# Altium PCB SpeakEasy_Audio.PcbDoc
Units mil, origin at the board's own origin, x right, y up, seen from the top; angles counter-clockwise.
Board outline 3149.61 x 3149.61 mil, 2 copper layers (Top Layer, Bottom Layer), stack 62.8 mil thick; 104 components, 69 nets, 289 pads, 95 vias.
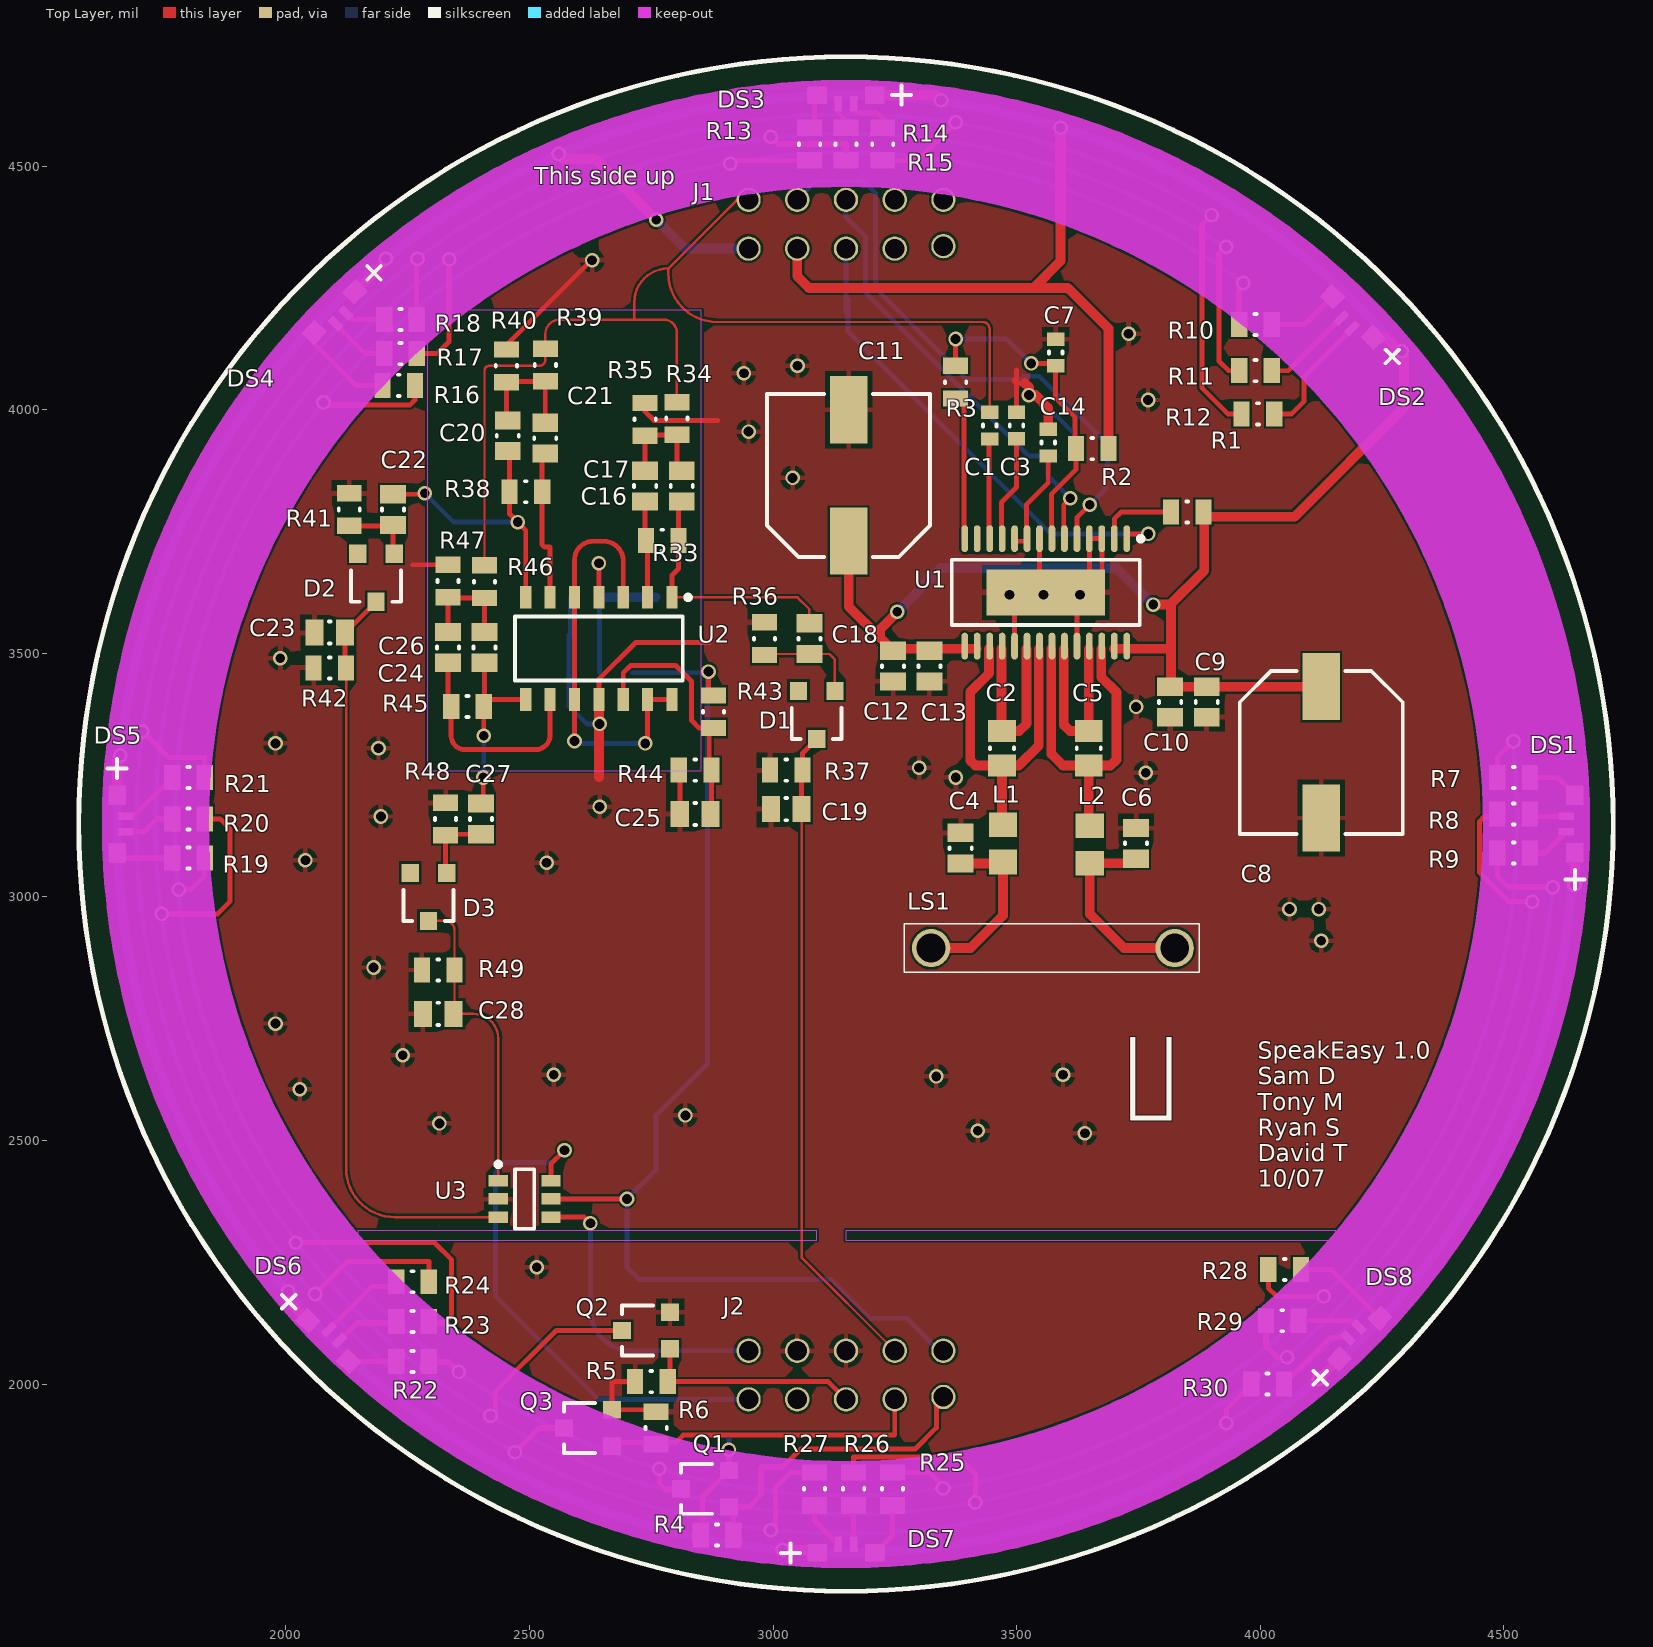
[diagram p0: Top Layer view]
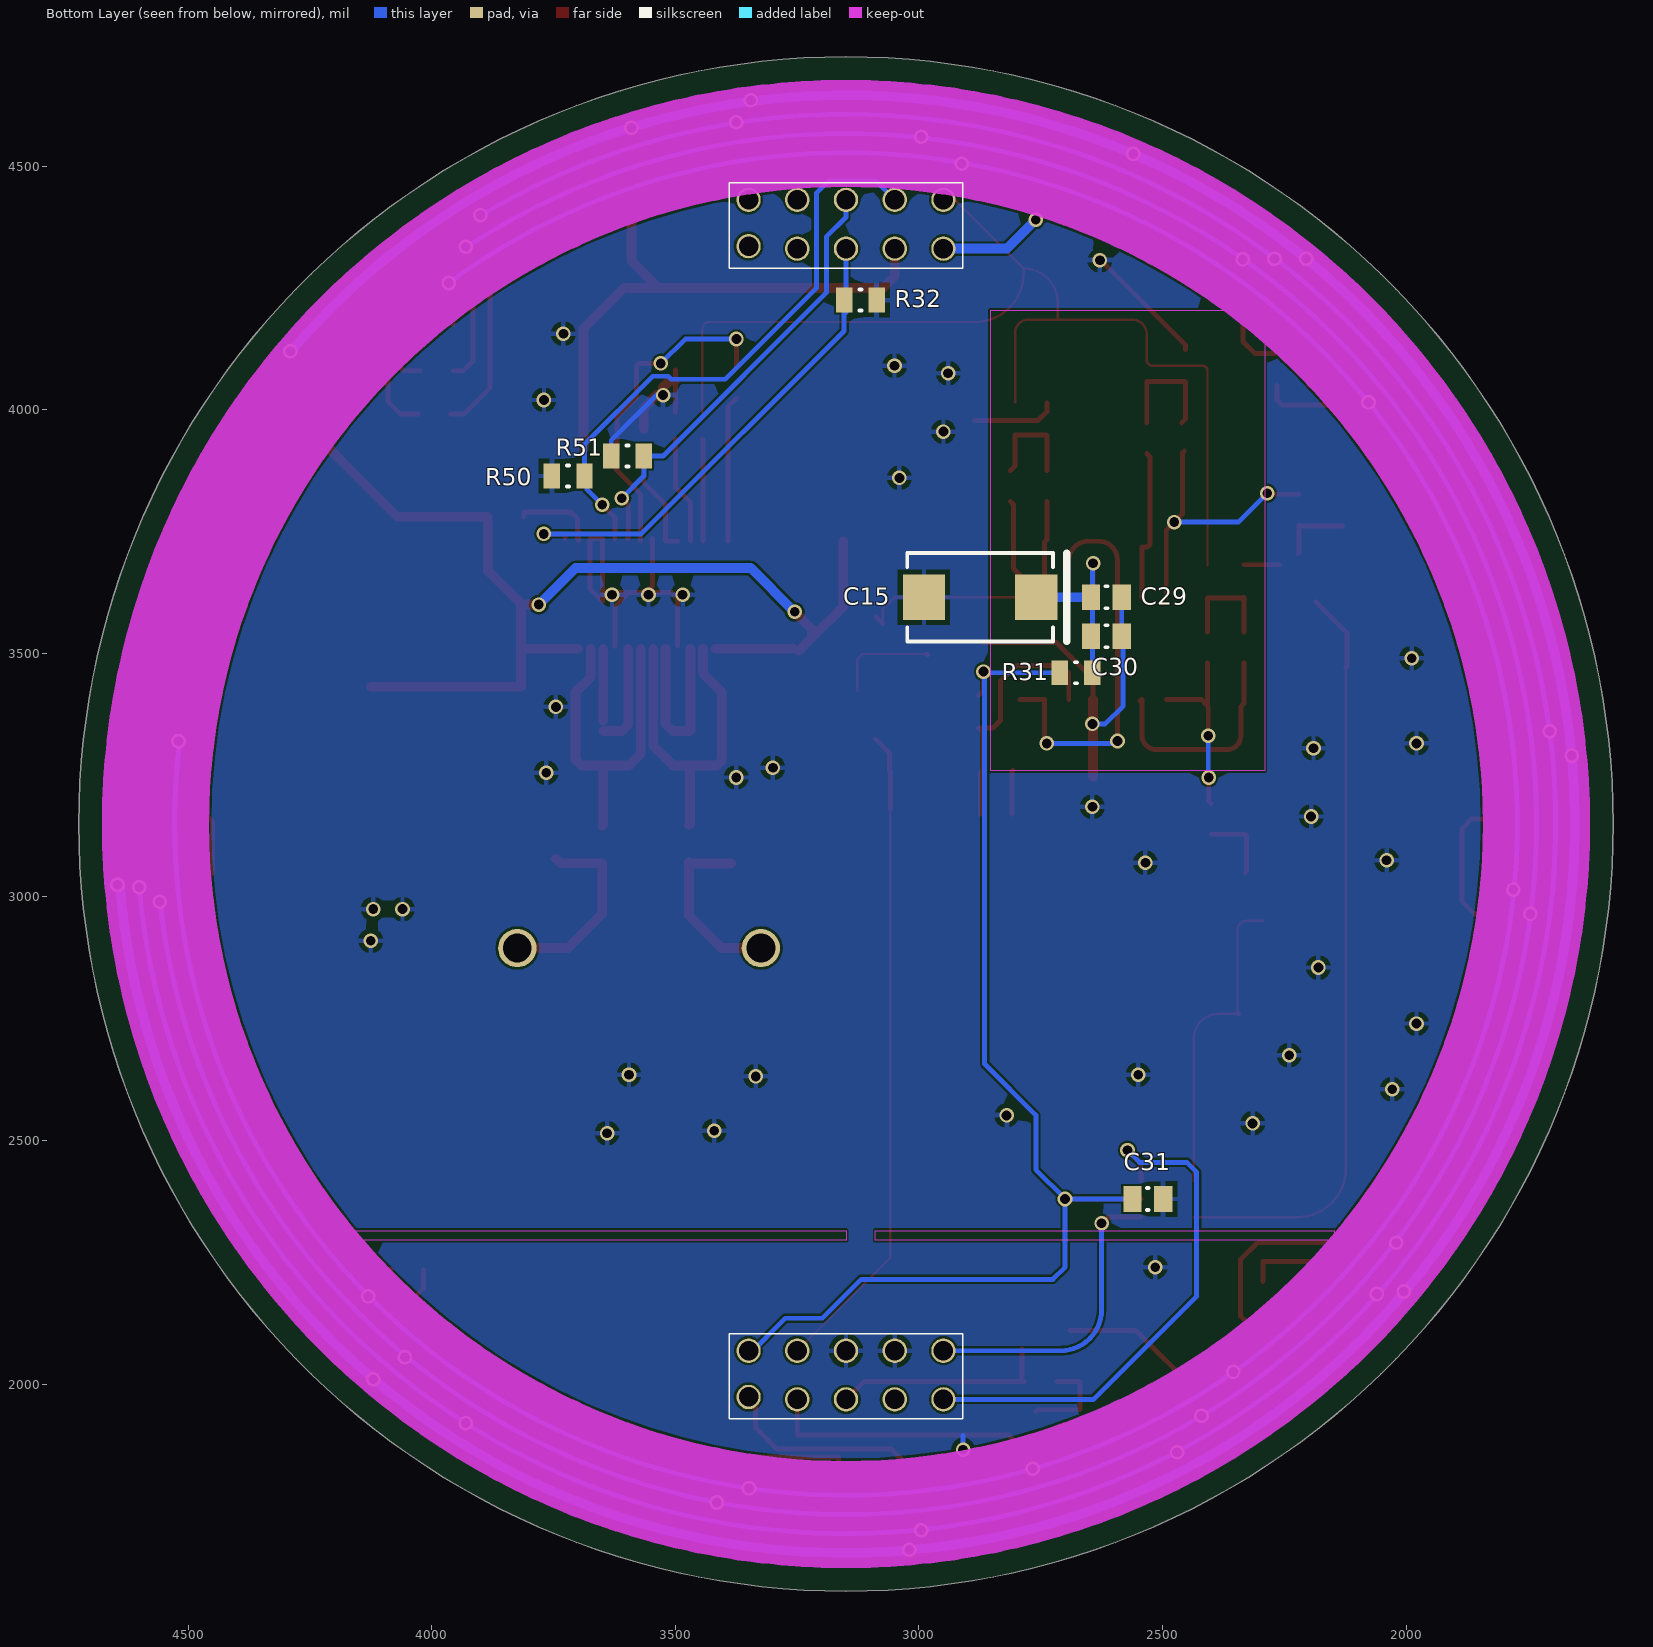
[diagram p1: Bottom Layer view, seen from below]

## Layer stack, top to bottom
Top Solder: solder mask 0.4, Solder Resist, Dk 3.5
Top Layer: signal copper 1.4
Dielectric 1: dielectric 60, FR-4, Dk 4.8
Bottom Layer: signal copper 1.4
Bottom Solder: solder mask 0.4, Solder Resist, Dk 3.5

## Board outline
3149.61,1574.8 cw(c3149.61,3149.61) 1574.8,3149.61 cw(c3149.61,3149.61) 3149.61,4724.41 cw(c3149.61,3149.61) 4724.41,3149.61 cw(c3149.61,3149.61)

## Design rules (kind name [scope] priority, off if disabled: settings)
Clearance [All] p1: gap=5 ignorepadtopadclearanceinfootprint=FALSE except(0: SMDPad-Hole THPad-Hole Via-Hole Fill-Hole Poly-Hole Region-Hole Text-Hole)
DiffPairsRouting [All] p1: maxlimit=10 minlimit=10 mostfreqgap=10 toplayer_minwidth=3.5 toplayer_maxwidth=15 toplayer_prefwidth=15 bottomlayer_minwidth=3.5 bottomlayer_maxwidth=15 bottomlayer_prefwidth=15 maxuncoupledlength=500
HoleSize [All] p1: absolutevalues=TRUE maxlimit=200 minlimit=7.87 maxpercent=80.000 minpercent=20.000
MinimumAnnularRing [All] p1: minimumring=3
MinimumSolderMaskSliver [All] p1: minsoldermaskwidth=1
PolygonConnect [All] p1: connectstyle=Relief reliefconductorwidth=10 reliefentries=4 polygonreliefangle="90 Angle" airgapwidth=10
RoutingVias [All] p1: holewidth=20 width=30 viastyle="Through Hole" minholewidth=8 minwidth=18 maxholewidth=28 maxwidth=50
SilkToSolderMaskClearance [IsPad] p1: minsilkscreentomaskgap=5 clearancetoexposedcopper=TRUE
SolderMaskExpansion [All] p1: expansion=4
Width [All] p1: maxlimit=20 minlimit=3.5 preferedwidth=10 minimp=50.000000 maximp=50.000000 favimp=50.000000
26 further rules are at their usual default settings.

## Classes and differential pairs
net class Analog: +3v3 ADC_HIGH ADC_LOW ADC_MID GND NetC16_1 NetC16_2 NetC17_2 NetC18_2 NetC20_1 NetC20_2 NetC21_2 NetC22_2 NetC24_1 NetC24_2 NetC26_2 NetC27_2 NetD1_2 NetD2_2 NetD3_2 OP_AMP_Supply uDAC_OUT VGND
component class Designator: DS1 DS2 DS3 DS4 DS5 DS6 DS7 DS8 Q1 Q2 Q3 R4 R5 R6 R7 R8 R9 R10 R11 R12 R13 R14 R15 R16 R17 R18 R19 R20 R21 R22 R23 R24 R25 R26 R27 R28 R29 R30

## Components (designator, comment, footprint, x,y, rotation, side; value= is the part's Value field where it differs from the comment)
C1 "1uF" CAPC0603(1608)100_L 3444.61,3967.44 r270 top
C2 ".47uF" CAPC0805(2012)110_N 3469.61,3305 r270 top value=470nF
C3 "1uF" CAPC0603(1608)100_L 3499.61,3967.56 r270 top
C4 "1000pF" CAPC0805(2012)145_L 3385,3100 r270 top
C5 ".47uF" CAPC0805(2012)110_N 3647.84,3305 r270 top value=470nF
C6 "1000pF" CAPC0805(2012)145_L 3745,3110 r90 top
C7 "1uF" CAPC0603(1608)100_L 3579.92,4117.44 r90 top
C8 "UCL1V101MNL1GS" NIC-UCL1V101MNL1GS_L 4125,3296.65 r270 top
C9 "0.1uF" CAPC0805(2012)145_L 3890,3400 r90 top
C10 "1000pF" CAPC0805(2012)145_L 3815,3400 r90 top
C11 "UCL1V101MNL1GS" NIC-UCL1V101MNL1GS_L 3155,3865 r90 top
C12 "0.1uF" CAPC0805(2012)145_L 3246.11,3473.5 r90 top
C13 "1000pF" CAPC0805(2012)145_L 3321.11,3473.5 r90 top
C14 "1uF" CAPC0603(1608)100_L 3564.61,3932.44 r270 top
C15 "T491D106K035AT" KEMT-T491-D_L 2874.42,3615 r0 bottom
C16 "CAP0805" CAPC0805(2012)145_L 2812.4,3843.27 r270 top value=.0033uF
C17 "CAP0805" CAPC0805(2012)145_L 2737.4,3843.27 r270 top value=.022uF
C18 "CAP0805" CAPC0805(2012)145_L 3074.53,3530 r270 top value=22uF
C19 "CAP0805" CAPC0805(2012)145_L 3026.93,3180 r0 top value=4.7uF
C20 "CAP0805" CAPC0805(2012)145_L 2455.43,3946.54 r270 top value=.01uF
C21 "CAP0805" CAPC0805(2012)145_L 2532.4,3941.54 r270 top value=.068uF
C22 "CAP0805" CAPC0805(2012)145_L 2220,3795 r270 top value=22uF
C23 "CAP0805" CAPC0805(2012)145_L 2090,3542.4 r0 top value=4.7uF
C24 "CAP0805" CAPC0805(2012)145_L 2407.6,3511.97 r270 top value=.1uF
C25 "CAP0805" CAPC0805(2012)145_L 2840,3170 r0 top value=1uF
C26 "CAP0805" CAPC0805(2012)145_L 2332.6,3511.97 r270 top value=.68uF
C27 "CAP0805" CAPC0805(2012)145_L 2400.2,3160 r270 top value=22uF
C28 "CAP0805" CAPC0805(2012)145_L 2312.6,2760 r0 top value=22uF
C29 "CAP0805" CAPC0805(2012)145_L 2615,3615 r0 bottom value=0.1uF
C30 "CAP0805" CAPC0805(2012)145_L 2615,3535 r0 bottom value=0.1uF
C31 "CAP0805" CAPC0805(2012)145_L 2530,2380 r0 bottom value=0.1uF
D1 "BAT54-7-F" DIOD-SOT23-3_V 3089.53,3373.5 r180 top
D2 "BAT54-7-F" DIOD-SOT23-3_V 2185,3655 r180 top
D3 "BAT54-7-F" DIOD-SOT23-3_V 2292.6,3000 r180 top
DS1 "APFA3010SEEZGQBDC" KING-APFA3010SEEZGQBDC-4_V 4645.67,3149.61 r270 top
DS2 "APFA3010SEEZGQBDC" KING-APFA3010SEEZGQBDC-4_V 4190,4190 r315 top
DS3 "APFA3010SEEZGQBDC" KING-APFA3010SEEZGQBDC-4_V 3149.61,4645.67 r0 top
DS4 "APFA3010SEEZGQBDC" KING-APFA3010SEEZGQBDC-4_V 2100,4200 r45 top
DS5 "APFA3010SEEZGQBDC" KING-APFA3010SEEZGQBDC-4_V 1653.54,3149.61 r90 top
DS6 "APFA3010SEEZGQBDC" KING-APFA3010SEEZGQBDC-4_V 2086.76,2088.24 r135 top
DS7 "APFA3010SEEZGQBDC" KING-APFA3010SEEZGQBDC-4_V 3149.61,1653.54 r180 top
DS8 "APFA3010SEEZGQBDC" KING-APFA3010SEEZGQBDC-4_V 4203.66,2093.61 r225 top
J1 "Stack Headers" SSW-105 3149.61,4330.71 r0 top locked
J2 "Stack Headers" SSW-105 3149.61,1968.5 r0 top locked
L1 "MI0805K601R-10" LIRD-MI0805K601R-10-2_V 3471.66,3110 r270 top
L2 "MI0805K601R-10" LIRD-MI0805K601R-10-2_V 3650,3107.52 r270 top
LS1 "Made for use with 20AWG" SPEAKER 3324.23,2895 r0 top
Q1 "2N7002" STM-SOT-23-3_V 2860,1785 r90 top
Q2 "2N7002" STM-SOT-23-3_V 2739.21,2110 r90 top
Q3 "2N7002" STM-SOT-23-3_V 2620,1910 r90 top
R1 "100K" RESC0805(2012)_L 3850,3790 r180 top value=100k
R2 "10R" RESC0805(2012)_L 3655,3920 r180 top value=10
R3 "100k" RESC0805(2012)_L 3374.61,4056.42 r270 top
R4 "1k" RESC0805(2012)_L 2885,1690 r0 top
R5 "1k" RESC0805(2012)_L 2750,2005 r0 top
R6 "1k" RESC0805(2012)_L 2760,1910 r270 top
R7 "500R" RESC0805(2012)_L 4520,3245 r0 top
R8 "500R" RESC0805(2012)_L 4520,3170 r0 top
R9 "500R" RESC0805(2012)_L 4520,3090 r0 top
R10 "500R" RESC0805(2012)_L 3990,4175 r0 top
R11 "500R" RESC0805(2012)_L 3990,4080 r0 top
R12 "500R" RESC0805(2012)_L 3995,3991.54 r0 top
R13 "500R" RESC0805(2012)_L 3075,4545 r90 top
R14 "500R" RESC0805(2012)_L 3149.61,4545 r90 top
R15 "500R" RESC0805(2012)_L 3225,4545 r90 top
R16 "500R" RESC0805(2012)_L 2231.54,4050 r180 top
R17 "500R" RESC0805(2012)_L 2235,4115 r180 top
R18 "500R" RESC0805(2012)_L 2235,4185 r180 top
R19 "500R" RESC0805(2012)_L 1800,3080 r180 top
R20 "500R" RESC0805(2012)_L 1800,3160 r180 top
R21 "500R" RESC0805(2012)_L 1800,3245 r180 top
R22 "500R" RESC0805(2012)_L 2260,2046.48 r180 top
R23 "500R" RESC0805(2012)_L 2260,2128.24 r180 top
R24 "500R" RESC0805(2012)_L 2260,2210 r180 top
R25 "500R" RESC0805(2012)_L 3245,1785 r270 top
R26 "500R" RESC0805(2012)_L 3165.35,1785 r270 top
R27 "500R" RESC0805(2012)_L 3085,1785 r270 top
R28 "500R" RESC0805(2012)_L 4050,2235 r0 top
R29 "500R" RESC0805(2012)_L 4045,2130 r0 top
R30 "500R" RESC0805(2012)_L 4015,2000 r0 top
R31 "RES0805" RESC0805(2012)_L 2677.36,3460 r0 bottom value=100R
R32 "100K" RESC0805(2012)_L 3120,4225 r0 bottom value=100k
R33 "RES0805" RESC0805(2012)_L 2772.4,3731.77 r180 top value=7.5k
R34 "RES0805" RESC0805(2012)_L 2802.4,3981.77 r270 top value=4.3k
R35 "RES0805" RESC0805(2012)_L 2737.4,3980.24 r90 top value=7.5k
R36 "RES0805" RESC0805(2012)_L 2982.32,3530 r270 top value=39k
R37 "RES0805" RESC0805(2012)_L 3026.93,3260 r0 top value=100k
R38 "RES0805" RESC0805(2012)_L 2492.4,3831.54 r0 top value=10k
R39 "RES0805" RESC0805(2012)_L 2532.4,4091.54 r270 top value=6.2k
R40 "RES0805" RESC0805(2012)_L 2452.4,4090 r90 top value=9.1k
R41 "RES0805" RESC0805(2012)_L 2130,3795 r270 top value=39k
R42 "RES0805" RESC0805(2012)_L 2090,3470 r0 top value=100k
R43 "RES0805" RESC0805(2012)_L 2877.4,3380 r90 top value=100k
R44 "RES0805" RESC0805(2012)_L 2840,3260 r0 top value=100k
R45 "RES0805" RESC0805(2012)_L 2372.6,3390.68 r180 top value=10k
R46 "RES0805" RESC0805(2012)_L 2407.6,3646.97 r270 top value=6.2k
R47 "RES0805" RESC0805(2012)_L 2332.6,3648.26 r90 top value=9.1k
R48 "RES0805" RESC0805(2012)_L 2327.6,3160 r270 top value=39k
R49 "RES0805" RESC0805(2012)_L 2312.6,2850 r0 top value=100k
R50 "100K" RESC0805(2012)_L 3720,3863.81 r180 bottom value=100k
R51 "100K" RESC0805(2012)_L 3597.99,3904.88 r180 bottom value=100k
U1 "TPA3111D1PWPR" TI-PWP28-5720X1950TP_Q 3559.61,3625 r270 top
U2 "MC33204DR2G" ONSC-SOIC-14-751A-03_V 2642.4,3510 r270 top
U3 "TS5A3159" SOT95P280X145-6N 2490,2380 r0 top

## Footprints (in the part's own frame and the unit in brackets; to place one, negate y for a bottom-side part, rotate by r counter-clockwise, add the part's x,y. Pads: shape width x height; smd on the part's side, far side on the other; paste and mask are expansions set on the pad)
CAPC0603(1608)100_L [mm] "Chip Capacitor, Body 1.6x0.8mm, Height 1.0mm, IPC High Density"
  rect 0.7x0.9 smd: 1(-0.7,0) 2(0.7,0)
  silkscreen extent -0.05,-0.35 0.05,0.35, body extent -0.87,-0.47 0.88,0.48, height 1
CAPC0805(2012)110_N [mm] "Chip Capacitor, Body 2.0x1.2mm, Height 1.1mm, IPC Medium Density"
  rect 1.15x1.45 smd: 1(-0.9,0) 2(0.9,0)
  silkscreen extent -0.05,-0.62 0.05,0.63, body extent -1.1,-0.72 1.1,0.73, height 1.1
CAPC0805(2012)145_L [mm]
  rect 0.95x1.35 smd: 1(-0.8,0) 2(0.8,0)
  silkscreen extent -0.05,-0.58 0.05,0.58, body extent -1.1,-0.72 1.1,0.72, height 1.45
DIOD-SOT23-3_V [mm] "SOT23, 3-Leads, Body 3x1.4mm, Pitch 0.95mm"
  rect 0.9x0.95 smd: 1(-0.95,-1.25) 2(0.95,-1.25) 3(0,1.25)
  silkscreen extent -1.3,-0.38 1.3,1.25, body extent -1.14,-1.18 1.17,1.44, height 1.1
KEMT-T491-D_L [mm] "Molded Capacitor, 2-Leads, Body 7.60x4.60mm, IPC High Density"
  rect 2.2x2.35 smd: 1(-2.925,0) 2(2.925,0)
  silkscreen extent -4.52,-2.3 3.8,2.3, body extent -3.8,-2.3 3.8,2.3, height 3.1
KING-APFA3010SEEZGQBDC-4_V [mm] "SMD, 4-Leads, Body 3x1.5mm, Height 1mm"
  rect 1x0.9 smd: 1(-1.5,0) 2(1.5,0)
  rect 0.4x0.8 smd: 3(0.4,-0.45) 4(-0.4,-0.45)
  silkscreen extent 2.4,-0.5 3.4,0.5, body extent -1.5,-0.25 1.5,1.25, height 1.01
LIRD-MI0805K601R-10-2_V [mm] "Chip Bead, 2-Leads, Body 2.2 x1.45 mm"
  rect 1.285x1.47 smd: 1(-0.972,0) 2(0.972,0)
  body extent -1.1,-0.72 1.1,0.73, height 1.1
NIC-UCL1V101MNL1GS_L [mm] "Aluminum Electrolytic Capacitor, Body 8.5x8.5x10.80mm, IPC High Density"
  rect 3.5x1.95 smd: 1(-3.425,0) 2(3.425,0)
  silkscreen extent -4.25,-4.25 4.25,4.25, body extent -4.65,-4.25 4.65,4.25, height 10.8
ONSC-SOIC-14-751A-03_V [mm] "SOIC, 14-Leads, Body 8.75x4mm, Pitch 1.27mm"
  rect 1.18x0.58 smd: 1(-2.66,3.81) 2(-2.66,2.54) 3(-2.66,1.27) 4(-2.66,0) 5(-2.66,-1.27) 6(-2.66,-2.54) 7(-2.66,-3.81) 8(2.66,-3.81) 9(2.66,-2.54) 10(2.66,-1.27) 11(2.66,0) 12(2.66,1.27) 13(2.66,2.54) 14(2.66,3.81)
  silkscreen extent -2.78,-4.38 1.67,4.78, body extent -2,-4.38 2,4.38, height 1.75
RESC0805(2012)_L [mm]
  rect 0.85x1.3 smd: 1(-0.85,0) 2(0.85,0)
  silkscreen extent -0.05,-0.55 0.05,0.55, body extent -1.1,-0.67 1.1,0.68, height 0.7
SOT95P280X145-6N [mm] "SOT23, 6-Leads, Body 2.90x2.80mm, Pitch 0.95mm, IPC Medium Density"
  rect 1x0.6 smd: 1(-1.375,0.95) 2(-1.375,0) 3(-1.375,-0.95) 4(1.375,-0.95) 5(1.375,0) 6(1.375,0.95)
  silkscreen extent -1.5,-1.55 0.5,1.92, body extent -0.88,-1.52 0.87,1.53, height 1.45
SPEAKER [mm]
  round 2 hole 1.5: 1(0,0) 2(12.7,0)
  silkscreen extent -1.4,-1.27 13.97,1.27
SSW-105 [mil] "For use in the stack as the downfacing connection"
  round 50 hole 40: 1(-200,0) 2(-100,0) 3(0,0) 4(100,0) 5(200,5) 6(200,100) 7(100,100) 8(0,100) 9(-100,100) 10(-200,100)
  body extent -260,-49 260,146, height 61
STM-SOT-23-3_V [mm] "SOT23, 3-Leads, Body 3.016x2.8mm, Pitch 0.95mm"
  rect 0.9x0.95 smd: 1(-0.95,-1.25) 2(0.95,-1.25) 3(0,1.25)
  silkscreen extent -1.3,-0.38 1.3,1.25, body extent -1.14,-1.25 1.17,1.36, height 1.25
TI-PWP28-5720X1950TP_Q [mm] "SOP, 28-Leads, Body 9.8x4.5mm, Pitch 0.65mm, Thermal Pad 6.17x2.4mm, IPC High Density"
  oval 1.4x0.35 smd: 1(-2.8,4.225) 2(-2.8,3.575) 3(-2.8,2.925) 4(-2.8,2.275) 5(-2.8,1.625) 6(-2.8,0.975) 7(-2.8,0.325) 8(-2.8,-0.325) 9(-2.8,-0.975) 10(-2.8,-1.625) 11(-2.8,-2.275) 12(-2.8,-2.925) 13(-2.8,-3.575) 14(-2.8,-4.225) 15(2.8,-4.225) 16(2.8,-3.575) 17(2.8,-2.925) 18(2.8,-2.275) 19(2.8,-1.625) 20(2.8,-0.975) 21(2.8,-0.325) 22(2.8,0.325) 23(2.8,0.975) 24(2.8,1.625) 25(2.8,2.275) 26(2.8,2.925) 27(2.8,3.575) 28(2.8,4.225)
  rect 2.4x6.17 smd: 29(0,0)
  silkscreen extent -2.92,-4.9 1.7,5.08, body extent -2.25,-4.9 2.25,4.9, height 1.2

## Part data
C1 C3 C7 C14: library part CMP-1035-02740-1, "CAP 1uF 25V ±10% 0603 (1608 Metric) Thickness 1mm SMD", Case-EIA=0603, Case-Metric=1608, Rated Voltage="25 V", Tolerance=±10%, Max Thickness="1 mm", Technology=SMT
C2 C5: library part CMP-1036-04655-1, "CAP 470nF 50V ±20% 0805 (2012 Metric) Thickness 1.1mm SMD", Case-EIA=0805, Case-Metric=2012, Rated Voltage="50 V", Tolerance=±20%, Max Thickness="1.1 mm", Technology=SMT
C4 C6 C9 C10 C12 C13 C16 C17 C18 C19 C20 C21 C22 C23 C24 C25 C26 C27 C28 C29 C30 C31: library part CMP-1590-00003-1, "0805 (2012 Metric) Chip Capacitor", Case-EIA=0805, Case-Metric=2012, PackageReference=CAPC0805(2012)145
C8 C11: library part CMP-2000-07344-1, "Aluminum Electrolytic Capacitor, 100 uF, 35 V, 20%, -55 to 105 degC, 2-Pin SMD, RoHS, Tape and Reel", Capacitance=100uF, Case Diameter=8mm, Case Height=8.3mm, Case Length=10mm, Leakage Current=3uA, Manufacturer=Nichicon, Maximum Operating Temperature=+105C, Minimum Operating Temperature=-55C, Operating Temperature Range=-55Cto+105C, Package Description="2-Pin Surface Mount Device, Body 8.3 x 8.3 mm, Height 10.8 mm", Ripple Current=850mA, Tolerance=20%, Voltage Rating=35V, Brand=Nichicon, Datasheet URL=http://datasheet.octopart.com/UCL1V101MNL1GS-Nichicon-datasheet-41194108.pdf, Datasheet Version=01/2015, Dimensions=8mmDia.x10mmLx8.3mmH, Dissipation Factor DF=0.12, Factory Pack Quantity=500, Load Life=2000h, Manufacturer URL=http://www.nichicon.co.jp/english/, Mounting Technology=SurfaceMount, Package Reference=UCL1V101MNL1GS, Packaging=Reel, Product=LowImpedanceElectrolyticCapacitors, Product Category=AluminumElectrolyticCapacitors-SMD, RoHS=Details, Series=CL, Termination Style=SMD/SMT, Type=AluminumElectrolyticCapacitors,ChipType,LowImpedance, Voltage Rating DC=35V
C15: library part CMP-2000-07580-1, "Tantalum Capacitor, 10 uF, +/- 10%, 35 V, -55 to 125 degC, 2-Pin SMD, RoHS, Tape and Reel", Capacitance=10uF, Case\/Package=2917, Case Code (Metric)=7343, Dielectric Material=Tantalum, ESR (Equivalent Series Resistance)=1Ohm, Leakage Current=3.5uA, Manufacturer=Kemet, Max Operating Temperature=125degC, Min Operating Temperature=-55degC, Package Description="2-Pin Surface Mount Device, Body 7.3 x 4.3 mm", Package Quantity=1, Package Reference=T491-D, Tolerance=20%, Voltage=35V, Case Code (Imperial)=2917, Datasheet URL=http://www.kemet.com/Lists/ProductCatalog/Attachments/254/KEM_T2005_T491.pdf, Datasheet Version=07/2017, Depth=4.3mm, Dissipation Factor=6%, Height=2.8mm, Height - Seated (Max)=0.122inch, Lead Free=LeadFree, Length=7.3mm, Life (Hours)=2000Hour, Manufacturer URL=http://www.kemet.com/, Mount=PCB, Mounting Technology=SurfaceMount, Number of Pins=2, Packaging=TapeandReel, Polarity=Polar, Radiation Hardening=No, REACH SVHC=NoSVHC, RoHSCompliant=True, Termination=SMD/SMT, Voltage Rating=35V, Voltage Rating (DC)=35V, Width=4.3mm
D1 D2 D3: library part CMP-0303-00002-1, "Schottky Diode, 30V ,200mW, SOT23-3", Forward Current Limit="200 mA", Manufacturer="Diodes Inc", Power Dissipation="200 mW", Reverse Current="2 uA @25 V", Storage Temperature="-55 to 150 degC", ComponentLink1Description="Manufacturer URL", ComponentLink1URL=http://www.diodes.com/, ComponentLink2Description=Datasheet, ComponentLink2URL=http://www.diodes.com/datasheets/ds11005.pdf, ComponentLink3Description="Package Specification", ComponentLink3URL=http://www.diodes.com/datasheets/ap02002.pdf, Mounting Technology="Surface Mount", PackageDescription="3-Pin SOT23, 3 x 1.4 mm Body, 0.95 mm Pitch", PackageReference=SOT23, PackageVersion="Rev. 73", PartNumber=BAT54-7-F
DS1 DS2 DS3 DS4 DS5 DS6 DS7 DS8: library part CMP-1226-00001-1, "Right Angle SMD Chip LED Lamp, -40 to 85 degC, 4-Pin SMD, RoHS, Reel", Manufacturer=Kingbright, Operating Temperature Range="-40 to 85 degC", C(Blue)="100 pF Typ.", C(Green)="45 pF Typ.", C(Red)="25 pF Typ.", ComponentLink1Description="Manufacturer URL", ComponentLink1URL=http://www.kingbright.com/, ComponentLink2Description=Datasheet, ComponentLink2URL=http://www.kingbrightusa.com/images/catalog/spec/APFA3010SEEZGQBDC.pdf, ComponentLink3Description="Package Specification", ComponentLink3URL=http://www.kingbrightusa.com/images/catalog/spec/APFA3010SEEZGQBDC.pdf, DatasheetVersion="Rev. 12B", IR(Blue)="50 uA Max.", IR(Green)="50 uA Max.", IR(Red)="10 uA Max.", Mounting Technology="Surface Mount", PackageDescription="4-Pin Surface Mount Device, Body 3 x 1.5 mm, Height 1 mm", Packing=Reel, PartNumber=APFA3010SEEZGQBDC, RoHS=TRUE
L1 L2: library part CMP-2000-05196-1, "Chip Bead for Power Filtering, 1500 mA, 600 Ohm, -40 to 125 degC, 0805 (2012 Metric), RoHS, Tape and Reel", Current Rating (Max)=1.5A, DC Resistance (DCR) (Max)=100mOhm, Impedance @ Frequency=600Ohm@100MHz, Manufacturer=Laird, Operating Temperature=-40degC~125degC, Package / Case=0805(2012Metric), Package Description="2-Pin Surface Mount Device, Body 2 x 1.25 mm", Package Reference=MI0805K601R-10-2, Ratings=-, Standard Package=1, Catalog Drawings=(HI,HZ,LI,MI)0805Series_1.10mmMax.Height, Category=Filters, Datasheet URL=https://datasheet.ciiva.com/3082/mi0805k601r-10-a-vp-3082219.pdf, Datasheet Version="Rev. A, 01/2004", Family=FerriteBeadsandChips, Filter Type=PowerLine, Height (Max)="0.043\"(1.10mm)", Kits=240-2227-ND-KITEMIFERRITEBEADCHIPSMD, Manufacturer URL=https://www.lairdtech.com, Mounting Type=SurfaceMount, Number of Lines=1, Online Catalog=MISeries, Other Names=240-2390-1, Packaging=CutTape(CT), Series=MI, Size / Dimension="0.079\"Lx0.049\"W(2.00mmx1.25mm)"
LS1: library part Speaker_Footprint
Q1 Q2 Q3: library part CMP-0434-00001-1, "N-channel 60 V, 1.8 Ohm, 0.35 A STripFET(TM) II Power MOSFET, SOT23", Manufacturer=STMicroelectronics, ComponentLink1Description="Manufacturer URL", ComponentLink1URL=http://www.st.com/, ComponentLink2Description=Datasheet, ComponentLink2URL=http://www.st.com/st-web-ui/static/active/en/resource/technical/document/datasheet/CD00005134.pdf, DatasheetVersion="Rev. 9, 11/2008", Mounting Technology="Surface Mount", PackageDescription="3-Pin SOT23, 3.016 x 2.8 mm Body, 0.95 mm Pitch", PackageReference=SOT-23, PartNumber=2N7002
R1 R2 R3 R4 R5 R6 R7 R8 R9 R10 R11 R12 R13 R14 R15 R16 R17 R18 R19 R20 R21 R22 R23 R24 R25 R26 R27 R28 R29 R30 R31 R32 R33 R34 R35 R36 R37 R38 R39 R40 R41 R42 R43 R44 R45 R46 R47 R48 R49 R50 R51: library part CMP-1591-00002-1, "0805 (2012 Metric) Chip Resistor", Case-EIA=0805, Case-Metric=2012, PackageReference=RESC0805(2012)
U1: library part CMP-0994-00250-1, "10 W Mono Class-D Audio Power Amplifier with SpeakerGuard(TM), -40 to 85 degC, 28-pin SOP (PWP28), Green (RoHS & no Sb/Br)", Manufacturer="Texas Instruments", Power Stage Supply Min(V)=8, Analog Supply Max [V]=26, Analog Supply Min [V]=8, Code_JEDEC=MO-153, ComponentLink1Description="Manufacturer URL", ComponentLink1URL=http://www.ti.com/, ComponentLink2Description=Datasheet, ComponentLink2URL=http://www.ti.com/general/docs/lit/getliterature.tsp?genericPartNumber=TPA3111D1&fileType=pdf, ComponentLink3Description="Package Specification", ComponentLink3URL=http://www.ti.com/litv/pdf/mpds373, DatasheetVersion=SLOS618C, Eco-Plan="Green (RoHS & no Sb/Br)", Input Type=Analog, Max. Number of Speaker Outputs=1, Mounting Technology="Surface Mount", PackageDescription="28-Pin Plastic Small Outline, Body 4.4 x 9.7 mm, Pitch 0.65 mm", PackageReference=PWP28-5720X1950TP, PackageVersion="4073225-6/I, 05/2011", PartNumber=TPA3111D1PWPR, SubFamily="Mid/High-Power Amplifier"
U2: library part CMP-1310-00192-1, "Low Voltage, Rail-to-Rail Operational Amplifier, 1.8 to 12 V, -40 to 105 degC, 14-Pin SOIC, Pb-Free, Tape and Reel", Manufacturer="On Semiconductor", ComponentLink1Description="Manufacturer URL", ComponentLink1URL=http://www.onsemi.com/, ComponentLink2Description=Datasheet, ComponentLink2URL=http://www.onsemi.cn/pub_link/Collateral/MC33201-D.PDF, ComponentLink3Description="Package Specification", ComponentLink3URL=http://www.onsemi.com/pub_link/Collateral/751A-03.PDF, DatasheetVersion="Rev. 17", GBW Typ (MHz)=2.2, Mounting Technology="Surface Mount", PackageDescription="14-Pin Small Outline Integrated Circuit, Body 8.65 x 3.9 mm, Pitch 1.27 mm", PackageReference=SOIC-14-751A-03, PackageVersion="Rev. K, 05/2011", Packing="Tape and Reel", PartId=1, PartNumber=MC33204DR2G, RoHS=TRUE, SR Typ (V/uS)=1, VCC Max (V)=12, VCC Min (V)=1.8
U3: "A 2 to 1 mux for reducing number of ADCs required"
J1 J2: System=Connector

## Via types
v1: diameter 30, hole 20, Top Layer to Bottom Layer, 95 vias

## Nets (pads, with @x,y where several pads share a name; then routed paths per layer and width w, separated by ;. In a path a pad name is that pad's centre, name@x,y a point inside that pad or via, vN(x,y) a via of type N, cw(c..) or ccw(c..) an arc to the next point about the centre after c; other vN are vias at no path point)
+3V3: C31.2 J2.6 R31.2 R43.2 U3.5 | length 2530.8
  Top Layer w10: U3.5 v1(2700,2380) ; v1@2867.4,3470 v1(2867.4,3462.4) 2867.4,3423.46 R43.2 ; J2.6@3349.61,2059.61 J2.6
  Bottom Layer w10: C31.2 v1(2700,2380) ; R31.2 2865,3460 2865,2656.93 2760,2551.93 2760,2440 v1(2700,2380) ; J2.6@3349.61,2059.61 3274.21,2135 3198.15,2135 3118.15,2215 2725,2215 2700,2240 v1(2700,2380)
+12V: C8.1 C9.2 C10.2 C11.1 C12.2 C13.2 DS1.2 DS2.2 DS3.2 DS4.2 DS5.2 DS6.2 DS7.2 DS8.2 J1.1 J1.2 R1.1 R2.1 U1.15 U1.16 U1.27 U1.28 | length 13230.2
  Top Layer w20: DS5.2 1653.54,3283.54 v1(1660,3290) ; v1(2005,2190) 2005,2170 DS6.2 ; DS4.2 2205,4305 v1(2205,4310) ; v1(2560,4525) 2570,4515 2635,4515 v1(2760,4390) ; v1(3020,1660) 3084.09,1660 DS7.2 ; J1.2 3049.61,4273.7 3073.31,4250 3535,4250 ; C11.1 3155,3596.11 3220,3531.11 ; DS3.2 3334.06,4645.67 v1(3344.72,4635) ; C12.2 3220,3531.11 ; v1(3255,3585) 3220,3550 3220,3531.11 ; C12.2@3259.61,3510.55 3260.63,3509.53 U1.16@3417.52,3509.53 ; v1(3590,4578.46) 3590,4305 3535,4250 ; R2.1 3688.46,4166.54 3605,4250 3535,4250 ; U1.27@3699.02,3509.53 3816.62,3509.53 ; v1(3780,3600) 3815.16,3600 3885,3669.84 3885,3780 4070,3780 4295,4005 4295,4110 4256.76,4148.24 DS2.2 ; 3816.62,3598.54 3816.62,3509.53 ; v1(4120,2010) 4120.05,2010 DS8.2 ; C8.1 C9.2 3816.62,3431.5 3816.62,3509.53 ; v1(4645,3025) 4645.67,3025.67 DS1.2
  Bottom Layer w20: v1(2760,4390) 2819.29,4330.71 J1.1 ; v1(3255,3585) 3345,3675 3705,3675 v1(3780,3600) ; v1@4288.99,4119.14 ccw(c3149.61,3149.61) v1@4640.5,3025.37
  other v1: 4290,4120
ADC_HIGH: C19.2 D1.3 J2.7 R37.2 | length 1351.8
  Top Layer w5: C19.2 3058.43,2259.68 J2.7
  Top Layer w10: C19.2 3058.43,3258.03 R37.2 3060.39,3295.16 D1.3 ; J2.7 J2.7@3253.5,2068.5
ADC_HIGH_MID: J2.10 U3.4 | length 636.1
  Top Layer w10: U3.4 2612.4,2342.6 v1(2625,2330)
  Bottom Layer w10: v1(2625,2330) 2625,2152.56 ccw(c2709.06,2152.56) 2709.06,2068.5 J2.10
ADC_LOW: C28.2 D3.3 R49.2 U3.1 | length 649.3
  Top Layer w5: D3.3 2326.81,2950.79 cw(c2326.81,2931.54) 2346.06,2931.54 R49.2 C28.2@2346.06,2761.97 ; C28.2 2385,2760 cw(c2385,2709.13) 2435.87,2709.13 U3.1
  Top Layer w10: C28.2 C28.2@2346.06,2761.97
ADC_MID: C23.2 D2.3 R42.2 U3.3 | length 1559.9
  Top Layer w5: R42.2 2123.46,2442.6 ccw(c2223.46,2442.6) 2223.46,2342.6 U3.3
  Top Layer w10: R42.2 2121.5,3471.97 C23.2 2121.61,3542.4 D2.3
ADC_SWITCH: J2.1 U3.6 | length 1096.9
  Top Layer w10: U3.6 2544.13,2452.2 v1(2571.93,2480)
  Bottom Layer w10: v1(2571.93,2480) 2546.93,2455 2450,2455 2430,2435 2430,2180 2641.5,1968.5 J2.1
GAIN0: J1.9 R50.2 U1.5 | length 1195.2
  Top Layer w10: U1.5 3623.59,3778.59 v1(3650,3805)
  Bottom Layer w10: J1.9 3088.9,4470 3185,4470 3210,4445 3210,4250 3397.51,4062.49 3508.58,4062.49 3514.64,4068.55 3546.45,4068.55 3686.54,3928.46 R50.2 ; v1(3650,3805) 3681.54,3836.54 R50.2@3681.54,3845
GAIN1: J1.8 R51.2 U1.6 | length 915.3
  Top Layer w10: U1.6 3596.66,3736.57 3596.66,3805 v1(3610,3818.34)
  Bottom Layer w10: J1.8 3149.61,4395.39 3190,4355 3190,4240 3525.12,3904.88 R51.2 3564.53,3863.81 v1(3610,3818.34)
GND: C3.1 C4.1 C6.2 C7.2 C8.2 C9.1 C10.1 C11.2 C12.1 C13.1 C14.1 C15.2 C19.1 C23.1 C25.1 C28.1 C29.1 C30.1 C31.1 J2.8 J2.9 Q1.2 Q2.2 Q3.2 R4.1 R5.1 R6.1 R32.1 R35.2 R36.1 R37.1 R40.2 R41.1 R42.1 R44.1 R47.2 R48.1 R49.1 R50.1 R51.1 U1.3 U1.4 U1.8 U1.19 U1.24 U1.29 U2.11 U3.2 | length 2992.4
  Top Layer w10: 2259.99,3681.72 R47.2 ; R40.2 2452.4,4132.4 2628.46,4308.46 v1(2628.46,4306.54) ; v1@2642.4,3355 v1(2643.9,3355) ; U2.11 2642.4,3446.79 2717.58,3521.97 2869.43,3521.97 ; R5.1 2670,2005 2669.21,2004.21 Q3.2 2756.06,1947.4 R6.1 ; R35.2 2737.4,3996.16 2755.53,3978.03 2885.84,3978.03 ; R44.1 2808.5,3258.03 C25.1 ; R4.1 2855,1693.46 2855,1768.19 Q1.2 v1(2909.21,1865) ; 3494.36,4060 3499.61,4054.75 ; U1.19 3495.63,3612.48 3508.15,3625 U1.29 ; C3.1 3499.61,4054.75 ; 3499.61,4081.88 3499.61,4054.75 ; 3516.46,4054.75 3499.61,4054.75 ; v1(3525,4030) v1@3538.55,4030 ; U1.8 3546.81,3637.8 U1.29 ; U1.24 3623.59,3596.51 U1.29@3595.1,3625 ; U1.29 U1.29@3595.1,3625 ; U1.29@3595.1,3625 3646.81,3625 U1.29@3649.18,3627.36 ; U1.29@3649.18,3627.36 3649.18,3605.71 3674.77,3631.3 U1.3 U1.4 U1.29@3649.18,3627.36
  Top Layer w20: 2642.4,3245.71 2642.4,3355 U2.11 ; 3516.46,4054.75 3525,4046.2 v1(3525,4030) ; v1@3538.55,4030 3564.61,4003.94 C14.1
  Bottom Layer w10: C30.1 C30.1@2583.5,3540 ; C29.1 C30.1@2583.5,3540 ; v1(2643.9,3355) 2617.4,3355 2580.91,3391.5 2580.91,3537.4 C30.1@2583.5,3540 ; 2909.21,1894.21 v1(2909.21,1865) v1@2910,1865.79 ; v1(3525,4030) 3538.55,4030 3631.46,3937.09 R51.1
  other v1: 2515,2240 3640,2515 3420,2520 2315,2535 2820,2551.54 2028.52,2605 3335,2631.54 2550,2635 3595,2635 2240,2675 1978.52,2740 2180,2855 4125,2910 4060,2975 4120,2975 2535,3070 2040,3075 2195,3165 2643.84,3185 3375,3245 3765,3255 3299.61,3265 2190,3305 1978.52,3315 3745,3390 1988.52,3490 3485,3620 3555,3620 3630,3620 3040,3860 2949.61,3955 3769.61,4020 2940,4075 3050,4090 3729.61,4155.87
GVDD: C14.2 U1.9 U1.10 | length 219
  Top Layer w10: U1.10@3494.29,3730 3519.88,3730 3519.88,3805.28 3564.61,3850 C14.2
LED_B: Q2.3 R8.1 R11.1 R14.1 R17.1 R20.1 R23.1 R26.1 R29.1 | length 10047.2
  Top Layer w10: v1(1745,2965) 1860,2965 1885,2990 1885,3140 1865,3160 R20.1 ; v1(2020,2290) 2305,2290 2340,2255 2340,2140 2325,2125 R23.1@2298.46,2125 ; R17.1 2310,4115 2335,4140 v1(2335,4308.46) ; v1(2420,1935) 2430,1945 2430,1985 2555,2110 Q2.3 ; v1(2995,4560) 3010,4545 3149.61,4545 R14.1 ; R26.1 3165.35,1850.35 3379.65,1850.35 3415,1815 v1(3415,1756.96) ; v1(3930,4334.46) 3915,4319.46 3915,4100 3935,4080 R11.1 ; R29.1 4011.54,2078.46 4035,2055 v1(4055,2055) ; R8.1 4481.54,3165 4460,3165 4450,3155 4450,3050 4510,2990 v1(4558.11,2990)
  Bottom Layer w10: v1@3415,1755 v1(3415,1756.96) ; v1@3929.21,4333.26 ccw(c3149.61,3149.61) v1@4557.92,2990.02 ; v1(3930,4334.46) v1@3930,4335 ; v1(4055,2055) v1@4060,2060
LED_G: Q3.3 R9.1 R12.1 R15.1 R18.1 R21.1 R24.1 R27.1 R30.1 | length 9375
  Top Layer w10: v1(1705,3340) 1758.46,3286.54 1833.46,3286.54 R21.1 ; v1(2059.87,2185) 2126.41,2251.54 2293.46,2251.54 R24.1 ; R18.1 2268.46,4308.46 v1(2270,4310) ; v1(2470,1860) 2520,1910 Q3.3 ; v1(2995,1700) 3005,1710 3005,1788.46 3035,1818.46 R27.1 ; R15.1 3296.54,4511.54 v1(3375,4590) ; v1(3900,4399.46) 3880,4379.46 3880,4045 3933.46,3991.54 R12.1 ; v1(3930,1920) 3930,1948.46 R30.1 ; R9.1 4486.54,3043.46 4510,3020 v1(4600,3020)
  Bottom Layer w10: v1(2059.87,2185) v1@2060,2185 ; v1@2990,1700 v1(2995,1700) ; v1@3899.42,4398.5 ccw(c3149.61,3149.61) v1@4600.52,3019.95 ; v1(3900,4399.46) v1@3900,4400
LED_R: Q1.3 R7.1 R10.1 R13.1 R16.1 R19.1 R22.1 R25.1 R28.1 | length 8623.3
  Top Layer w10: v1(1780,3015) 1805,3015 1833.46,3043.46 R19.1 ; v1@2085,4010 2255,4010 2265,4020 R16.1 ; R22.1@2295,2046.48 2296.48,2045 2335,2045 v1(2355,2025) ; v1(2766.31,1826.31) 2766.31,1797.16 2778.46,1785 Q1.3 ; v1(2912.22,4505) 2918.76,4511.54 R13.1 ; R25.1 3321.54,1818.46 3348.71,1791.29 v1(3348.71,1786.29) ; R10.1 3956.54,4246.54 ; R28.1 4016.54,2196.93 4033.46,2180 v1(4130,2180) ; R7.1 4486.54,3286.54 v1(4519.63,3319.63)
  Bottom Layer w10: v1(1780,3015) v1@1778.05,3016.95 ; 2895,4505 v1@2901.29,4505 ; v1(2912.22,4505) v1@2901.29,4505 ; v1@3964.83,4260.54 ccw(c3149.61,3149.61) v1@2901.29,4505 ; v1@4517.07,3319.31 cw(c3149.61,3149.61) v1@1778.05,3016.95 ; v1@1778.05,3016.95 cw(c3149.61,3149.61) v1@2901.29,4505
  other v1: 2077.04,4015 3965,4260.06
Mute: J1.3 R32.2 U1.1 | length 1037.5
  Top Layer w10: U1.1 3725.95,3745 v1(3770,3745)
  Bottom Layer w10: R32.2@3149.61,4199.61 J1.3 ; R32.2 3153.46,4161.54 3570,3745 v1(3770,3745)
NetC1_2: C1.2 U1.12 | length 212.6
  Top Layer w5: U1.12@3443.11,3730 U1.12@3444.61,3731.5
  Top Layer w10: U1.12@3443.11,3730 3443.11,3938.39 C1.2
NetC2_1: C2.1 U1.18 U1.20 | length 380.1
  Top Layer w20: U1.18@3468.7,3509.53 3468.7,3341.34 C2.1 3505.04,3340.43 3519.88,3355.28 U1.20@3519.88,3509.53
NetC2_2: C2.2 L1.1 U1.17 U1.21 | length 728.6
  Top Layer w20: U1.17@3443.11,3509.53 3443.11,3458.9 3404.61,3420.39 3404.61,3280 3415.04,3269.57 C2.2 ; L1.1 3469.61,3150.33 C2.2 ; U1.21@3545.48,3509.53 3545.48,3310.87 3504.18,3269.57 C2.2
NetC3_2: C3.2 U1.11 | length 222.8
  Top Layer w10: U1.11@3468.7,3730 3468.7,3810 3499.61,3840.91 C3.2
NetC5_1: C5.1 U1.23 U1.25 | length 360.7
  Top Layer w20: U1.23@3596.66,3509.53 3596.66,3352.95 3609.18,3340.43 C5.1 ; C5.1@3647.84,3361.77 U1.25@3647.84,3509.53
NetC5_2: C5.2 L2.1 U1.22 U1.26 | length 730.3
  Top Layer w20: U1.22@3571.07,3509.53 3571.07,3293.11 3594.61,3269.57 C5.2 ; L2.1 3647.84,3147.97 C5.2 ; U1.26@3673.43,3509.53 3673.43,3451.18 3704.61,3420 3704.61,3281.5 3692.68,3269.57 C5.2
NetC7_1: C7.1 R2.2 R3.1 U1.7 | length 693.1
  Top Layer w10: R3.1 v1(3374.61,4145) ; v1(3529.61,4095) 3574.81,4095 C7.1 ; U1.7@3571.07,3730 3571.07,3826.26 3621.54,3876.73 R2.2 ; C7.1@3579.61,4089.88 3579.61,4024.72 3620,3984.33 R2.2@3620,3907.68
  Bottom Layer w10: v1(3374.61,4145) 3479.61,4145 v1(3529.61,4095)
NetC16_1: C16.1 C17.1 R34.2 R35.1 | length 215.3
  Top Layer w10: C17.1 R35.1 2738.94,3948.31 R34.2 2802.4,3884.76 C16.1
NetC16_2: C16.2 C18.1 R33.1 U2.1 | length 546
  Top Layer w5: U2.1 3050.28,3614.72 3074.53,3590.47 C18.1
  Top Layer w10: U2.1 2792.4,3660 2805.87,3673.46 R33.1 2805.87,3805.24 C16.2 ; C18.1 C18.1@3088.31,3575.28
NetC17_2: C17.2 R33.2 U2.2 | length 201.3
  Top Layer w10: C17.2 2737.4,3733.31 R33.2 2742.4,3728.31 U2.2 U2.2@2743.94,3616.26
NetC18_2: C18.2 D1.1 R36.2 | length 214.8
  Top Layer w5: R36.2@2984.29,3498.5 C18.2 3116.02,3498.5 3126.93,3487.6 D1.1
  Top Layer w10: R36.2 R36.2@2984.29,3498.5
NetC20_1: C20.1 C21.1 R39.2 R40.1 | length 252.5
  Top Layer w10: C20.1@2460.43,3973.03 C20.1 2452.4,3981.06 R40.1 2453.94,4058.07 R39.2 C21.1
NetC20_2: C20.2 C22.1 R38.1 U2.7 | length 596.6
  Top Layer w10: C22.1 2283.03,3826.5 v1(2285,3828.46) ; C20.2 2458.94,3911.54 R38.1 2458.94,3786.06 v1(2475.67,3769.33) 2492.4,3752.6 U2.7
  Bottom Layer w10: v1(2285,3828.46) 2344.13,3769.33 v1(2475.67,3769.33)
NetC21_2: C21.2 R38.2 U2.6 | length 310.6
  Top Layer w10: C21.2 2525.87,3903.5 R38.2 2525.87,3725 ccw(c2532.4,3725) 2532.4,3718.46 2539.71,3718.46 cw(c2539.71,3715.77) 2542.4,3715.77 U2.6
NetC22_2: C22.2 D2.1 R41.2 | length 151.1
  Top Layer w10: R41.2 2218.03,3761.54 C22.2 2220,3706.61 D2.1
NetC24_1: C24.1 C26.1 R46.2 R47.1 | length 216.9
  Top Layer w10: C26.1 R47.1 2333.89,3613.5 R46.2 C24.1
NetC24_2: C24.2 C27.1 R45.1 U2.8 | length 382.3
  Top Layer w10: C27.1 2405,3196.3 v1(2405,3245) ; v1(2406.06,3330.87) R45.1 R45.1@2407.6,3392.21 ; C24.2 R45.1@2407.6,3392.21 ; U2.8 2420.66,3405.28 R45.1@2407.6,3392.21
  Bottom Layer w10: v1(2405,3245) 2406.06,3246.06 v1(2406.06,3330.87)
NetC25_2: C25.2 R43.1 R44.2 U2.12 | length 528.1
  Top Layer w10: U2.12 2692.4,3460 2707.4,3475 2800,3475 2832.4,3442.6 2832.4,3362.4 2848.27,3346.54 R43.1 2868.94,3338.07 2868.94,3260 2873.5,3255.43 C25.2@2873.5,3170
NetC26_2: C26.2 R45.2 U2.9 | length 466.8
  Top Layer w10: C26.2 2332.6,3397.21 R45.2 2339.13,3330.87 ccw(c2367.63,3330.87) 2367.63,3302.37 2512.37,3302.37 ccw(c2512.37,3332.4) 2542.4,3332.4 U2.9 U2.9@2545.87,3401.81
NetC27_2: C27.2 D3.1 R48.2 | length 151.7
  Top Layer w10: D3.1 2327.6,3051.61 R48.2 2329.57,3128.5 C27.2
NetDS1_1: DS1.1 R7.2 | length 107.3
  Top Layer w10: R7.2 4609.33,3245 DS1.1
NetDS1_3: DS1.3 R9.2 | length 92.7
  Top Layer w10: R9.2 4584.09,3090 DS1.3
NetDS1_4: DS1.4 R8.2 | length 76.4
  Top Layer w10: R8.2 4558.11,3165.35 DS1.4
NetDS2_1: DS2.1 R10.2 | length 148.3
  Top Layer w10: R10.2 4091.48,4175 DS2.1
NetDS2_3: DS2.3 R12.2 | length 262.3
  Top Layer w10: R12.2 4064.61,3991.54 4090,4016.93 4090,4067.73 DS2.3
NetDS2_4: DS2.4 R11.2 | length 187.9
  Top Layer w10: R11.2 4057.73,4080 DS2.4
NetDS3_1: DS3.1 R13.2 | length 69.5
  Top Layer w10: R13.2@3085,4578.46 3085,4640.12 DS3.1
NetDS3_3: DS3.3 R15.2 | length 107.9
  Top Layer w10: DS3.3 3165.35,4614.65 3170.39,4609.61 3213.86,4609.61 R15.2@3245,4578.46
NetDS3_4: DS3.4 R14.2 | length 62.4
  Top Layer w10: DS3.4 3133.86,4609.61 R14.2@3165,4578.46
NetDS4_1: DS4.1 R16.2 | length 175
  Top Layer w10: DS4.1@2058.24,4135 2143.24,4050 R16.2
NetDS4_3: DS4.3 R18.2 | length 83.5
  Top Layer w10: DS4.3 2137.27,4185 R18.2
NetDS4_4: DS4.4 R17.2 | length 125.6
  Top Layer w10: DS4.4 2162.73,4115 R17.2
NetDS5_1: DS5.1 R19.2 | length 117.4
  Top Layer w10: DS5.1 1664.09,3080 R19.2
NetDS5_3: DS5.3 R21.2 | length 128.3
  Top Layer w10: DS5.3 1686.89,3165.35 R21.2
NetDS5_4: DS5.4 R20.2 | length 106.1
  Top Layer w10: DS5.4 1708.86,3133.86 1735,3160 R20.2
NetDS6_1: DS6.1 R22.2 | length 99.6
  Top Layer w10: DS6.1 R22.2@2228.07,2046.48
NetDS6_3: DS6.3 R24.2 | length 179.9
  Top Layer w10: DS6.3 2176.25,2200 R24.2@2231.54,2200
NetDS6_4: DS6.4 R23.2 | length 135.8
  Top Layer w10: DS6.4 2145.79,2125 R23.2@2231.54,2125
NetDS7_1: DS7.1 R25.2 | length 113
  Top Layer w10: DS7.1 3245,1689.88 R25.2
NetDS7_3: DS7.3 R27.2 | length 100.5
  Top Layer w10: R27.2 3085,1720.12 DS7.3
NetDS7_4: DS7.4 R26.2 | length 80.3
  Top Layer w10: DS7.4 R26.2
NetDS8_1: DS8.1 R28.2 | length 203.2
  Top Layer w10: R28.2 4145.79,2235 DS8.1
NetDS8_3: DS8.3 R30.2 | length 170.9
  Top Layer w10: R30.2 4143.46,2095 DS8.3
NetDS8_4: DS8.4 R29.2 | length 129.1
  Top Layer w10: R29.2 4189.54,2130 DS8.4
NetR1_2: R1.2 U1.2 | length 187.2
  Top Layer w10: U1.2@3699.02,3730 U1.2@3699.02,3750 ; U1.2 3700.36,3775.75 3714.61,3790 3811.14,3790 R1.2@3811.14,3780
NetR3_2: R3.2 U1.14 | length 300.1
  Top Layer w10: R3.2 3391.93,4005.63 U1.14@3391.93,3730
OP_AMP_Supply: C15.1 C29.2 C30.2 R31.1 U2.4 | length 413.7
  Top Layer w10: U2.4 v1(2642.4,3685)
  Bottom Layer w10: v1@2637.4,3685 v1(2642.4,3685) 2643.9,3683.5 R31.1
  Bottom Layer w20: C29.2 C15.1
PWM_HIGH: J2.5 Q1.1 R4.2 | length 657.4
  Top Layer w10: R4.2 2918.46,1738.35 Q1.1 2949.61,1747.6 2975,1772.99 2975,1830 3019.48,1830 3056.33,1866.85 3291.85,1866.85 3335,1910 3335,1958.9 J2.5
PWM_LOW: J2.3 Q2.1 R5.2 | length 450.9
  Top Layer w10: Q2.1 2788.43,2009.96 R5.2 3113.11,2005 J2.3
PWM_MID: J2.4 Q3.1 R6.2 | length 671.1
  Top Layer w10: Q3.1@2663.46,1866.85 Q3.1 2676.61,1880 2800,1880 2815.39,1895.39 3249.61,1895.39 J2.4
SPKR_N: C6.1 L2.2 LS1.2 | length 406.3
  Top Layer w20: C6.1 3735.73,3069.23 L2.2 3650,2965 3720,2895 LS1.2
SPKR_P: C4.2 L1.2 LS1.1 | length 373.1
  Top Layer w20: LS1.1 3405,2895 3471.66,2961.66 L1.2 3468.45,3068.5 C4.2
uDAC_OUT: C1.1 J1.10 R34.1 R39.1 R46.1 | length 2307.9
  Top Layer w5: R46.1 2407.6,4080 cw(c2417.6,4080) 2417.6,4090 2519.6,4090 ccw(c2519.6,4102.8) 2532.4,4102.8 R39.1 2532.4,4155 cw(c2562.4,4155) 2562.4,4185 2715,4185 ; R34.1 2802.4,4157.79 ccw(c2775.19,4157.79) 2775.19,4185 2715,4185 ; J1.10 2925.71,4430.71 2785,4290 ; C1.1 3444.61,4165 ccw(c3429.61,4165) 3429.61,4180 2885,4180 cw(c2885,4280) 2785,4280 2785,4290 ; 2715,4185 2715,4220 cw(c2785,4220) 2785,4290
VGND: U2.3 U2.5 U2.10 U2.13 U2.14 | length 888.1
  Top Layer w10: v1@2597.4,3315 v1(2592.4,3320) U2.10 U2.5 2592.4,3691.5 cw(c2630.91,3691.5) 2630.91,3730 2652.4,3730 cw(c2652.4,3690) 2692.4,3690 U2.3 ; v1(2737.4,3315) 2742.4,3320 U2.13 U2.14
  Bottom Layer w10: v1(2592.4,3320) 2597.4,3315 v1(2737.4,3315)
pads on no net: D1.2 D2.2 D3.2 J1.4 J1.5 J1.6 J1.7 J2.2 U1.13

## Polygon pours and split planes (outlines as drawn)
GND on Bottom Layer "GND_L02_P001" (solid, remove dead copper, pour order 1): 3149.61,1574.8 cw(c3149.61,3149.61) 1574.8,3149.61 cw(c3149.61,3149.61) 3149.61,4724.41 cw(c3149.61,3149.61) 4724.41,3149.61 cw(c3149.61,3149.61)
GND on Top Layer "GND_L01_P000" (solid, remove dead copper, pour order 0): 3149.61,1574.8 cw(c3149.61,3149.61) 1574.8,3149.61 cw(c3149.61,3149.61) 3149.61,4724.41 cw(c3149.61,3149.61) 4724.41,3149.61 cw(c3149.61,3149.61)

## Keep-outs
Top Layer:
  region: 2315,2325
Keep-Out Layer:
  circle w220: c3149.61,3149.61 r1417.32
  rectangle: 3149.61,2295 4155,2315
  rectangle: 2147.6,2295 3089.53,2315
  region: 2290,4204.21 2290,3259.21 2852.98,3259.21 2852.98,4204.21

## Silkscreen, mask and mechanical layers (free items; w line width, h text height)
Top Overlay:
  circle w10: c3149.61,3149.61 r1574.8
  text "This side up" at 2510,4450 h60
  text "" at 3722.36,2465 h400
  text "SpeakEasy 1.0 / Sam D / Tony M / Ryan S / David T / 10/07" at 3995,2405 h35